# EAGLE board pcm5102_dac (EAGLE 9.5.1)
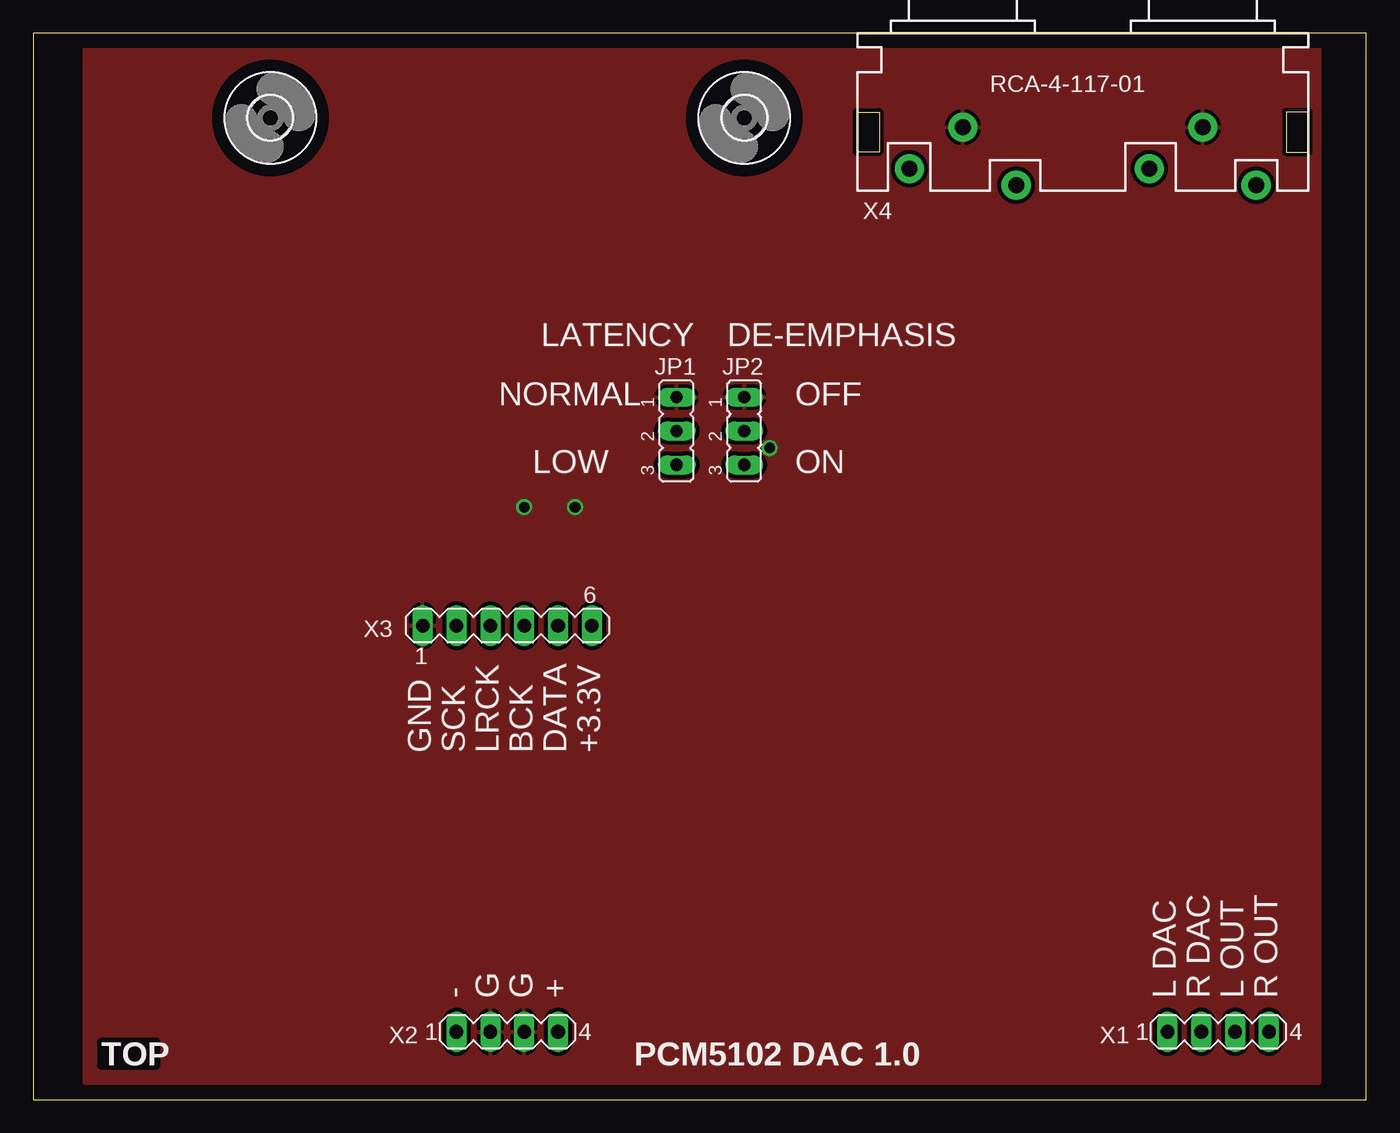
[diagram p0: board, top side]
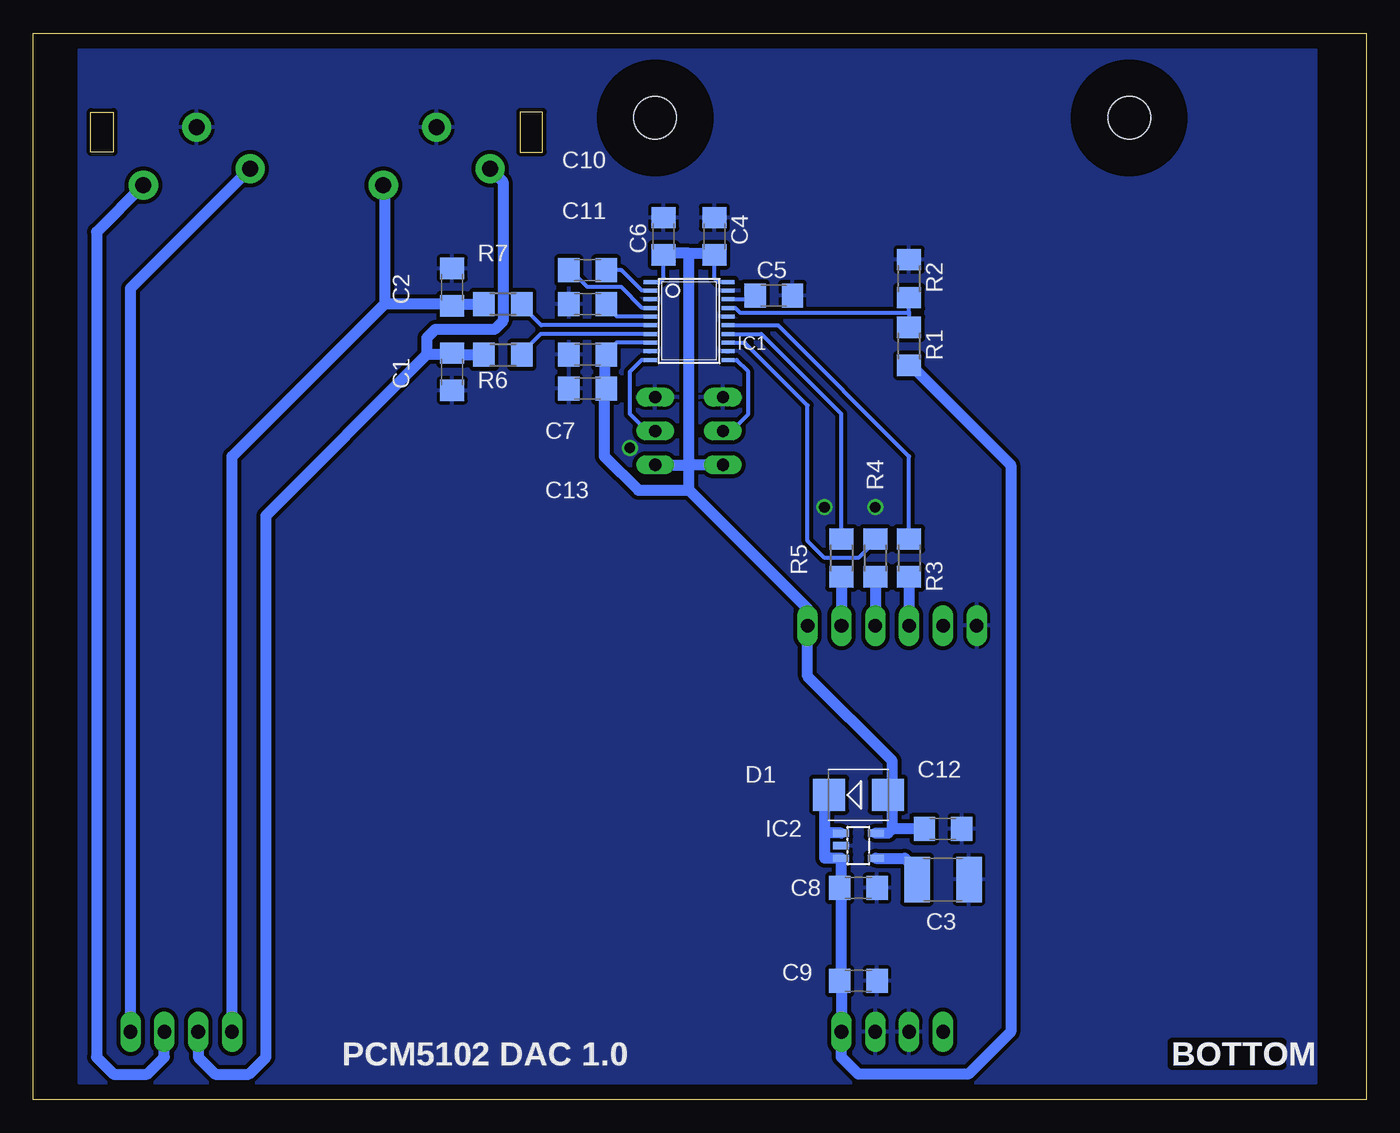
[diagram p1: board, bottom side, seen from below]

Size 100 x 80 mm. Coordinates in mm from the lower left corner, seen from the top.
Outline: 0,0 100,0 100,80 0,80 0,0
Copper layers (1*16): Top 0.035mm / dielectric 1.5mm / Bottom 0.035mm
Design rules "SeeedStudio_2layer_DRU_no_angle_20140221 *": minimum track width 6mil, minimum drill 12mil, track to track 6mil, track to pad 6mil, pad to pad 6mil, via to via 6mil, smd to smd 0mil, copper to edge 10mil, drill to drill 10mil, minimum pad ring 10mil, minimum via ring 6mil, stop-mask expansion 2mil, vias tented up to drill 100mil, thermal gap 10mil

## Footprints (pad centres in the part's own frame; a part is rotated, then mirrored left to right if it is on the bottom)
C1206 = smd 1.6 x 1.8: 1 -1.4,0; 2 1.4,0
C1812 = smd 1.9 x 3.4: 1 -1.95,0; 2 1.95,0
SMB = smd 2.4 x 2.4: A 2.2,0; C -2.2,0
3,2 = hole 3.2: 0,0
TSSOP20 = smd 0.305 x 0.991: 1 -2.925,-2.918; 2 -2.275,-2.918; 3 -1.625,-2.918; 4 -0.975,-2.918; 5 -0.325,-2.918; 6 0.325,-2.918; 7 0.975,-2.918; 8 1.625,-2.918; 9 2.275,-2.918; 10 2.925,-2.918; 11 2.925,2.918; 12 2.275,2.918; 13 1.625,2.918; 14 0.975,2.918; 15 0.325,2.918; 16 -0.325,2.918; 17 -0.975,2.918; 18 -1.625,2.918; 19 -2.275,2.918; 20 -2.925,2.918
SOT23-DBV = smd 0.55 x 1.2: 1 -0.95,-1.3; 2 0,-1.3; 3 0.95,-1.3; 4 0.95,1.3; 5 -0.95,1.3
JP2 = drill 0.914 long: 1 -2.54,0; 2 0,0; 3 2.54,0
R1206 = smd 1.6 x 1.803: 1 -1.422,0; 2 1.422,0
MA04-1 = drill 1.016 long: 1 -3.81,0; 2 -1.27,0; 3 1.27,0; 4 3.81,0
MA06-1 = drill 1.016 long: 1 -6.35,0; 2 -3.81,0; 3 -1.27,0; 4 1.27,0; 5 3.81,0; 6 6.35,0
RCA-4-117-01 = drill 1.2 pad 2.184: 1 9,3.1; 2 5,0; 3 13,-1.25; 4 -9,3.1; 5 -13,0; 6 -5,-1.25

## Placement (x,y rotation side)
C1  2n2  [C1206]  68.58,54.61 270 bottom
C2  2n2  [C1206]  68.58,60.96 90 bottom
C3  10nF  [C1812]  31.75,16.51 0 bottom
C4  100nF  [C1206]  48.9,64.77 270 bottom
C5  100nF  [C1206]  44.45,60.33 0 bottom
C6  100nF  [C1206]  52.7,64.77 270 bottom
C7  100nF  [C1206]  58.42,55.88 0 bottom
C8  2u2  [C1206]  38.1,15.88 0 bottom
C9  2u2  [C1206]  38.1,8.89 0 bottom
C10  2u2  [C1206]  58.42,62.23 0 bottom
C11  2u2  [C1206]  58.42,59.69 180 bottom
C12  10uF  [C1206]  31.75,20.32 0 bottom
C13  10uF  [C1206]  58.42,53.34 0 bottom
D1  schottky 1A  [SMB]  38.1,22.86 0 bottom
H1  MOUNT-HOLE3.2  [3,2]  17.78,73.66 0 top
H2  MOUNT-HOLE3.2  [3,2]  53.34,73.66 0 top
IC1  PCM510xA  [TSSOP20]  50.8,58.42 270 bottom
IC2  LP2992  [SOT23-DBV]  38.1,19.05 270 bottom
JP1  DIL  [JP2]  48.26,50.16 270 top
JP2  DIL  [JP2]  53.34,50.16 270 top
R1  7k5  [R1206]  34.29,56.52 270 bottom
R2  2k7  [R1206]  34.29,61.59 270 bottom
R3  22R  [R1206]  34.29,40.64 90 bottom
R4  22R  [R1206]  36.83,40.64 90 bottom
R5  22R  [R1206]  39.37,40.64 90 bottom
R6  470  [R1206]  64.77,55.88 180 bottom
R7  470  [R1206]  64.77,59.69 180 bottom
X1  S1G4  [MA04-1]  88.9,5.08 0 top
X2  S1G4  [MA04-1]  35.56,5.08 0 top
X3  S1G6  [MA06-1]  35.56,35.56 0 top
X4  RCA-4-117-01  [RCA-4-117-01]  78.74,69.85 0 top

## Library data of the parts
C1-C13 R1-R7 = rcl
D1 = diode
H1 H2 = holes
IC1 = pavouk
IC2 = texas; MF: TEXAS INSTRUMENTS; MPN: TPS77001DBVT; OC_FARNELL: 8461554; OC_NEWARK: 77C1171
JP1 JP2 = jumper
X1-X3 = con-lstb; OC_FARNELL: unknown; OC_NEWARK: unknown
X4 = con-conrad

## Nets
GND: C1.2 C2.2 C3.2 C4.1 C5.2 C6.1 C7.1 C8.2 C9.2 C11.2 C12.2 C13.1 IC1.3 IC1.9 IC1.12 IC1.16 IC1.19 IC2.2 JP1.1 JP2.1 R2.1 X2.2 X2.3 X3.1 X4.1 X4.4
LDOO: C5.1 IC1.18
N$1: R5.1 X3.5
N$2: C8.1 C9.1 D1.C IC2.1 IC2.3 R1.2 X2.4
N$3: X1.3 X4.3
N$4: C3.1 IC2.4
N$5: IC1.17 R1.1 R2.2
N$6: X1.4 X4.2
N$7: C2.1 R7.2 X1.1 X4.6
N$8: R3.1 X3.3
N$9: R4.1 X3.4
N$10: IC1.13 R4.2
N$11: IC1.14 R5.2
N$12: IC1.11 JP1.2
N$13: IC1.10 JP2.2
N$34: IC1.15 R3.2
N$43: C10.1 IC1.4
N$46: C10.2 IC1.2
N$47: C11.1 IC1.5
N$48: IC1.7 R6.1
N$49: IC1.6 R7.1
N$51: C1.1 R6.2 X1.2 X4.5
VDD: C4.2 C6.2 C7.2 C12.1 C13.2 D1.A IC1.1 IC1.8 IC1.20 IC2.5 JP1.3 JP2.3 X3.6

## Tracks (layer width: path | path; a pad name or v marks a point on that pad's centre or on a via)
GND  (via drill 0.8)
  other vias: 36.83,44.45 40.64,44.45 55.24,48.9
  pour Bottom (isolate 0.305): 3.81,1.27 96.52,1.27 96.52,78.74 3.81,78.74
  pour Top (isolate 0.305): 3.81,1.27 96.52,1.27 96.52,78.74 3.81,78.74
LDOO
  Bottom 0.305: IC1.18 45.85,60.05 C5.1
N$1
  Bottom 0.813: R5.1 X3.5
N$2
  Bottom 0.813: 39.37,8.89 X2.4 39.37,3.17 38.1,1.91 29.84,1.91 26.67,5.08 26.67,47.62 34.29,55.24 R1.2 | C9.1 39.37,8.89 | 39.37,8.89 39.37,15.88 | C8.1 39.37,15.88 | 39.37,15.88 39.37,18.07 IC2.3 40.64,18.1 40.64,20 | IC2.1 40.64,20 | D1.C 40.64,22.86 40.64,20
N$3
  Bottom 0.813: X1.3 90.17,3.17 91.44,1.91 93.98,1.91 95.25,3.17 95.25,65.09 X4.3
N$4
  Bottom 0.813: IC2.4 34.61,18.1 33.66,17.14 33.66,16.51 C3.1
N$5
  Bottom 0.305: IC1.17 47.33,59.4 46.99,59.05 34.29,59.05 | 34.29,59.05 R2.2 | 34.29,59.05 R1.1
N$6
  Bottom 0.813: X1.4 92.71,60.88 X4.2
N$7
  Bottom 0.813: 68.58,59.69 R7.2 | X1.1 85.09,48.26 73.66,59.69 | C2.1 68.58,59.69 | 68.58,59.69 73.66,59.69 | X4.6 73.66,68.52 73.66,59.69
N$8
  Bottom 0.813: R3.1 X3.3
N$9
  Bottom 0.813: R4.1 X3.4
N$10
  Bottom 0.305: R4.2 36.83,41.91 38.1,40.64 40.64,40.64 41.91,41.91 41.91,52.07 46.63,56.8 IC1.13
N$11
  Bottom 0.305: R5.2 39.37,51.44 45.38,57.45 IC1.14
N$12
  Bottom 0.305: JP1.2 47.62,50.16 46.35,51.44 46.35,54.61 47.24,55.49 IC1.11
N$13
  Bottom 0.305: JP2.2 53.98,50.16 55.24,51.44 55.24,54.61 54.36,55.49 IC1.10
N$34
  Bottom 0.305: R3.2 34.29,48.26 44.12,58.09 IC1.15
N$43
  Bottom 0.305: IC1.4 54.31,59.4 55.88,60.96 58.42,60.96 59.69,62.23 C10.1
N$46
  Bottom 0.305: IC1.2 54.34,60.7 55.88,62.23 C10.2
N$47
  Bottom 0.305: IC1.5 56.2,58.74 57.15,59.69 C11.1
N$48
  Bottom 0.305: IC1.7 61.94,57.45 63.5,55.88 R6.1
N$49
  Bottom 0.305: IC1.6 61.91,58.09 63.5,59.69 R7.1
N$51
  Bottom 0.813: 68.58,55.88 R6.2 | X1.2 87.63,3.17 86.36,1.91 83.82,1.91 82.55,3.17 82.55,43.81 70.48,55.88 | C1.1 68.58,55.88 | 68.58,55.88 70.48,55.88 | 70.48,55.88 70.48,57.15 69.85,57.78 65.41,57.78 64.77,58.42 64.77,68.88 X4.5
VDD
  Bottom 0.305: IC1.8 56.23,56.8 57.15,55.88 | 53.98,61.34 IC1.1 52.95,61.34 52.7,61.59 C6.2 | 47.62,61.34 IC1.20 48.65,61.34 48.9,61.59 C4.2
  Bottom 0.813: C7.2 57.15,55.88 57.15,53.34 | 35.56,20.32 35.56,22.86 | C12.1 35.56,20.32 | IC2.5 35.88,20 35.56,20.32 | D1.A 35.56,22.86 | 35.56,22.86 35.56,25.4 41.91,31.75 X3.6 41.91,36.83 50.8,45.72 | 50.8,45.72 50.8,47.62 | 50.8,47.62 50.8,63.5 | 57.15,53.34 57.15,48.26 54.61,45.72 50.8,45.72 | C13.2 57.15,53.34 | JP2.3 50.8,47.62 | JP1.3 50.8,47.62 | 50.8,63.5 52.7,63.5 C6.2 | 50.8,63.5 48.9,63.5 C4.2

## Text on the board
Top: TOP
Bottom: BOTTOM
tNames: LATENCY | DE-EMPHASIS | NORMAL | OFF | LOW | ON | GND | SCK | LRCK | BCK | DATA | +3.3V | - | G | G | + | L DAC | R DAC | L OUT | R OUT | TOP | PCM5102 DAC 1.0
bNames: BOTTOM | PCM5102 DAC 1.0